# Altium PCB PWR_Supply_with_BUCK_Converter.PcbDoc
Units mm, origin at the board's own origin, x right, y up, seen from the top; angles counter-clockwise.
Board outline 84.5 x 26.75 mm, 2 copper layers (Top Layer, Bottom Layer); 14 components, 8 nets, 39 pads, 9 vias.
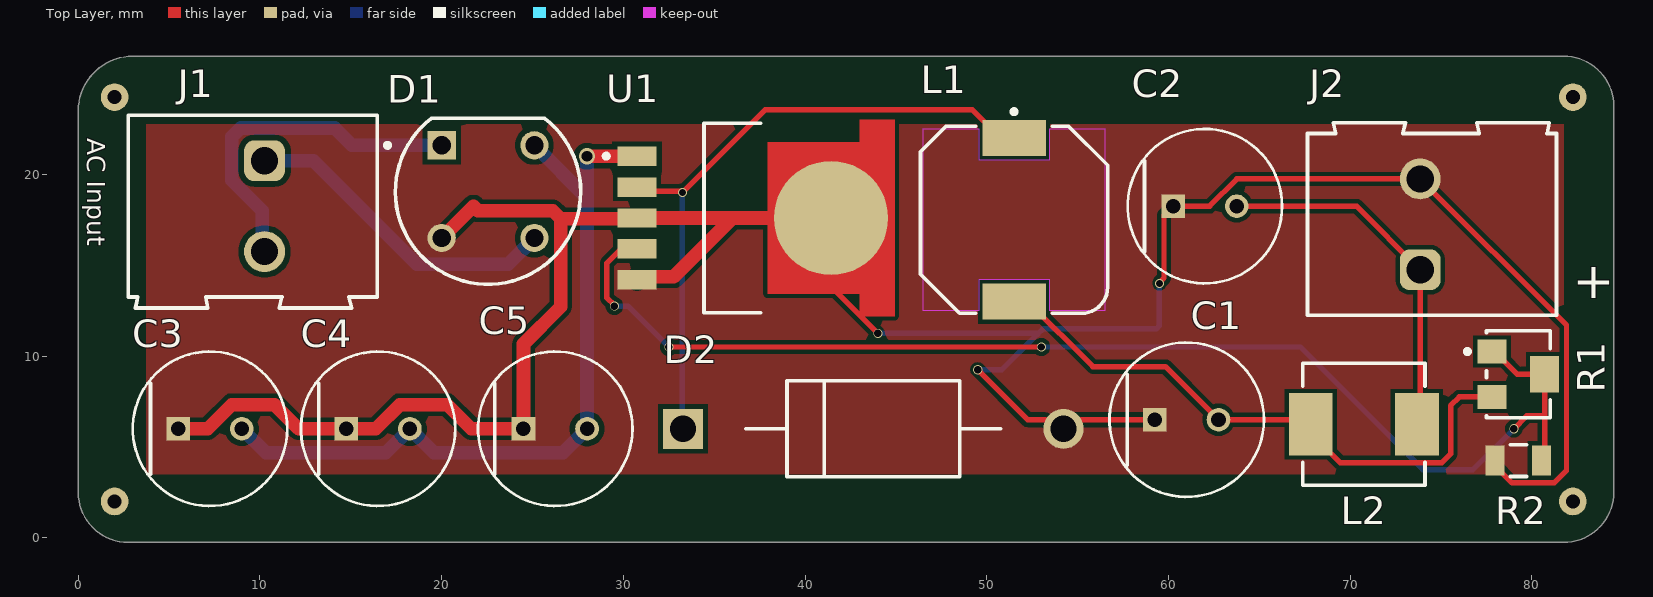
[diagram p0: Top Layer view]
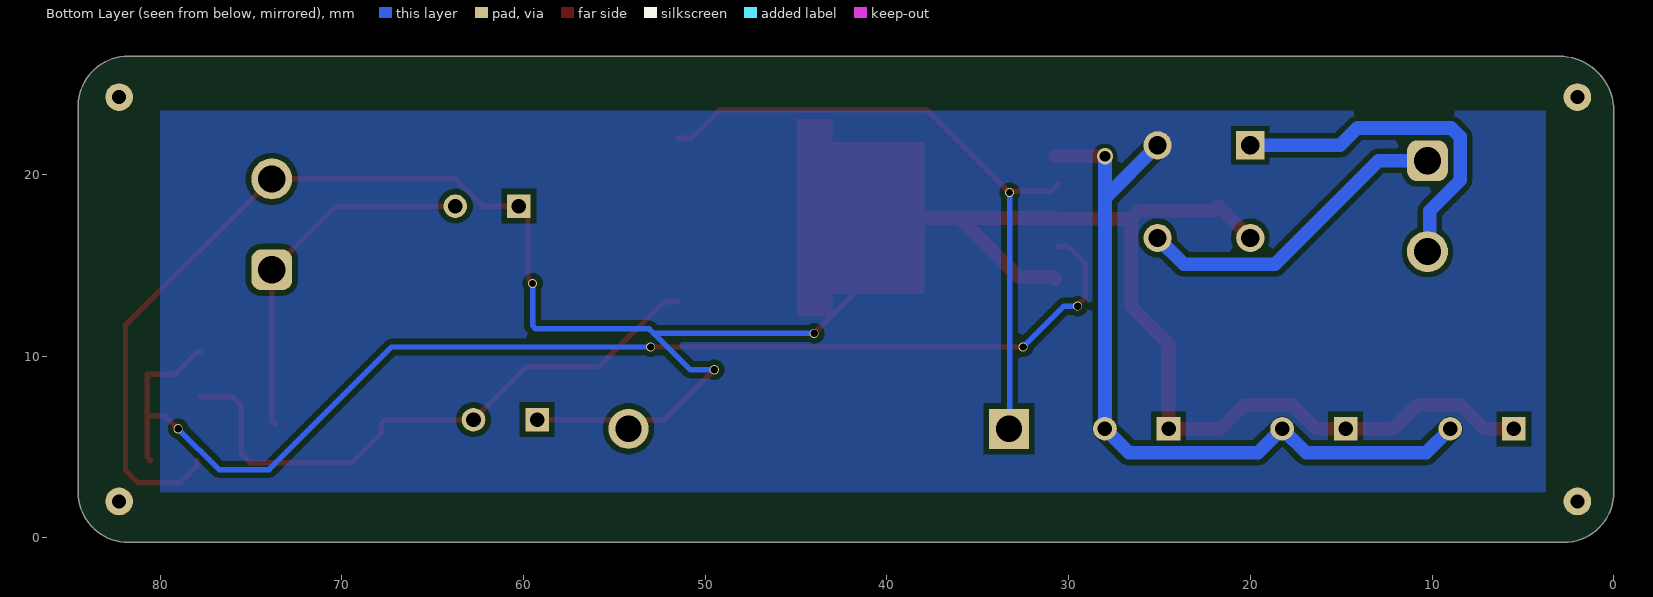
[diagram p1: Bottom Layer view, seen from below]
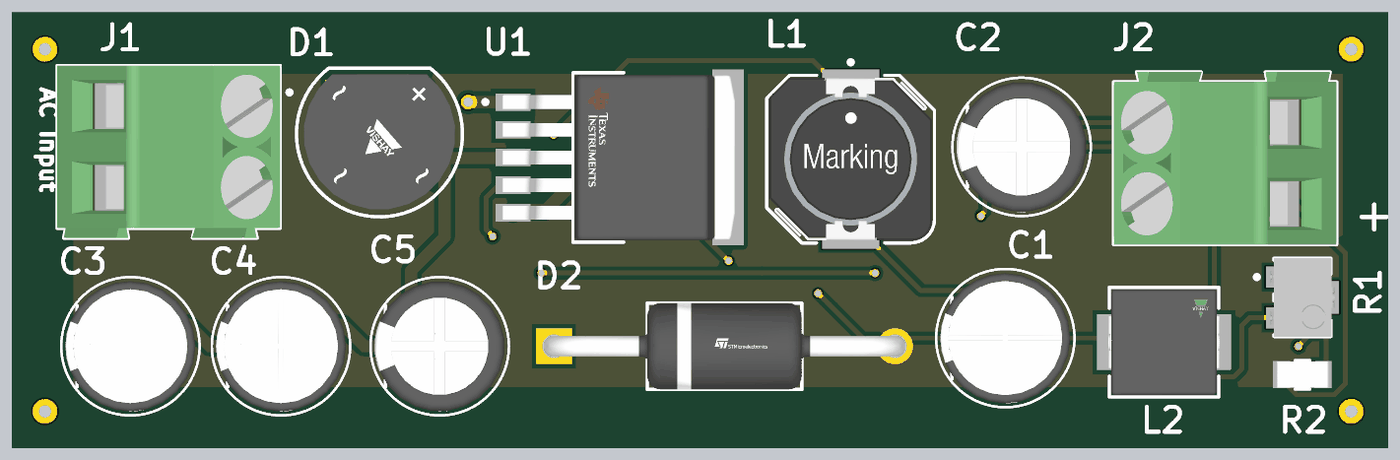
[diagram p2: 3D render of the assembled board from above, using the file's embedded part models]

## Layer stack, top to bottom
Top Solder: solder mask 0.0102, Solder Resist, Dk 3.5
Top Layer: signal copper 0.0356
Dielectric 1: core 0.32, FR-4, Dk 4.8
Bottom Layer: signal copper 0.0356
Bottom Solder: solder mask 0.0102, Solder Resist, Dk 3.5

## Board outline
2.75,-0.25 81.75,-0.25 ccw(c81.75,2.5) 84.5,2.5 84.5,23.75 ccw(c81.75,23.75) 81.75,26.5 3,26.5 ccw(c3,23.5) 0,23.5 0,2.5 ccw(c2.75,2.5)

## Design rules (kind name [scope] priority, off if disabled: settings)
Clearance PWR_Clearance [(InNet('AC50p+') OR InNet('AC50p-') OR InNet('Rectified50DC'))] p1: gap=0.3 ignorepadtopadclearanceinfootprint=FALSE
Clearance [All] p2: gap=0.25 ignorepadtopadclearanceinfootprint=FALSE
PlaneConnect [All] p1: planeconnectstyle=Direct reliefexpansion=0.508 reliefentries=4 reliefconductorwidth=0.254 reliefairgap=0.254
PolygonConnect [All] p1: connectstyle=Direct reliefconductorwidth=0.254 reliefentries=4 polygonreliefangle="90 Angle" airgapwidth=0.254
RoutingVias PWR_RoutingVias [(InNet('AC50p+') OR InNet('AC50p-') OR InNet('Rectified50DC'))] p1: holewidth=0.7 width=1 viastyle="Through Hole" minholewidth=0.5 minwidth=0.8 maxholewidth=0.6 maxwidth=0.9
RoutingVias [All] p2: holewidth=0.4 width=0.5 viastyle="Through Hole" minholewidth=0.4 minwidth=0.5 maxholewidth=0.4 maxwidth=0.5
SilkToSolderMaskClearance [IsPad] p1: minsilkscreentomaskgap=0.2 clearancetoexposedcopper=TRUE
SolderMaskExpansion [All] p1: expansion=0.102 istentingtop=FALSE
SupplyNets "Schematic Supply Nets" [InNet('GND')] p1: voltage=0.000
Width PWR_Width [(InNet('AC50p+') OR InNet('AC50p-') OR InNet('Rectified50DC') OR InNet('GND'))] p1: maxlimit=1 minlimit=0.3 preferedwidth=0.75
Width Widh [All] p2: maxlimit=0.3 minlimit=0.1 preferedwidth=0.2
28 further rules are at their usual default settings.

## Classes and differential pairs
component class PWR_Supply_With_BUCK_Converter: C1 C2 C4 C5 D2 J1 J2 L1 L2 R1 R2 U1

## Components (designator, comment, footprint, x,y, rotation, side; value= is the part's Value field where it differs from the comment)
C1 "EEUFM1V221L" FP-RAD-TH-D_8_0_5-L_15_1-MFG 61,6.5 r0 top
C2 "EEUFR1H101" FP-RAD-TH-D_8_0_5-L_11_5-MFG 62,18.25 r0 top
C3 "EEUFK0J102L" FP-RAD-TH-D_8_0_5-L_15_1-MFG 7.25,6 r0 top
C4 "EEUFK0J102L" FP-RAD-TH-D_8_0_5-L_15_1-MFG 16.5,6 r0 top
C5 "EEUFR1H101" FP-RAD-TH-D_8_0_5-L_11_5-MFG 26.25,6 r0 top
D1 "W02G-E4/51" FP-WOG-MFG 22.55,18.54 r0 top
D2 "1N5822" FP-DO-201AD-MFG 43.75,6 r0 top
J1 "691211720002" 691211720002 9.6,18.25 r270 top
J2 "691211720002" 691211720002 74.5,17.25 r90 top
L1 "7447714330" WE-PD_1050P 51.5,17.5 r0 top
L2 "IHLP2525CZER220M11" FP-IHLP-2525CZ-FP_2_413x3-MFG 70.75,6.25 r0 top
R1 "3214W-1-502E" BOUR-3214W_V 79.25,9 r0 top
R2 "MCA12060D5000BP500" FP-MCA1206-IPC_C 79.25,4.25 r0 top
U1 "LM2596SX-3.3/NOPB" FP-KTT0005B-MFG 38.88,17.6 r270 top

## Footprints (in the part's own frame and the unit in brackets; to place one, negate y for a bottom-side part, rotate by r counter-clockwise, add the part's x,y. Pads: shape width x height; smd on the part's side, far side on the other; paste and mask are expansions set on the pad)
691211720002 [mm] "5,00mm - modular - green -45¡ã entry with rising cage clamp - 02p"
  rrect50% 2.25x2.25 hole 1.5: 1(-2.5,0.65)
  round 2.25 hole 1.5: 2(2.5,0.65)
  silkscreen extent -5,-6.85 5.6,6.85, body extent -5,-6.85 5.6,6.85, height 15.72
BOUR-3214W_V [mm] "SMD, 3-Leads, Body 3.5x4.8mm, Pitch 1.25mm"
  rect 1.6x1.3 smd paste+0: 1(-1.45,1.25) 3(-1.45,-1.25)
  rect 1.6x2 smd paste+0: 2(1.45,0)
  silkscreen extent -2.92,-2.4 1.75,2.4, body extent -1.98,-2.41 1.98,2.41, height 5.28
FP-DO-201AD-MFG [mm]
  rect 2.2x2.2 hole 1.45 paste-2539.97 mask+0: 1(-10.47,0)
  round 2.2 hole 1.45 paste-2539.97 mask+0: 2(10.47,0)
  silkscreen extent -7,-2.65 7,2.65, body extent -11.67,-2.75 11.67,2.75, height 0.25
FP-IHLP-2525CZ-FP_2_413x3-MFG [mil]
  rect 95x135 smd paste+0 mask+0: 1(-115,0) 2(115,0)
  silkscreen extent -132,-132 132,132, body extent -166,-136 166,136, height 10
FP-KTT0005B-MFG [mm]
  rect 1.07x2.16 smd paste+0 mask+0: 1(-3.4,-8.13) 2(-1.7,-8.13) 3(0,-8.13) 4(1.7,-8.13) 5(3.4,-8.13)
  round 6.291 smd paste+0 mask+0: 6(0,2.545)
  Top Layer region: -5.4,6.04 5.4,6.04 5.4,4.13 4.165,4.13 4.165,-0.95 -4.165,-0.95 -4.165,4.13 -5.4,4.13 -5.4,6.04
  silkscreen extent -5.21,-9.95 5.21,-1.33, body extent -5.5,-9.31 5.5,6.14, height 0.25
FP-MCA1206-IPC_C [mm]
  rect 1.056x1.658 smd paste+0 mask+0: 1(-1.276,0) 2(1.276,0)
  silkscreen extent -0.45,-0.87 0.45,0.87, body extent -1.9,-0.97 1.9,0.97, height 0.25
FP-RAD-TH-D_8_0_5-L_11_5-MFG [mm]
  rect 1.3x1.3 hole 0.8 paste-2539.97 mask+0: 1(-1.75,0)
  round 1.3 hole 0.8 paste-2539.97 mask+0: 2(1.75,0)
  silkscreen extent -4.25,-4.25 4.25,4.25, body extent -4.35,-4.35 4.35,4.35, height 0.25
FP-RAD-TH-D_8_0_5-L_15_1-MFG [mm]
  rect 1.3x1.3 hole 0.8 paste-2539.97 mask+0: 1(-1.75,0)
  round 1.3 hole 0.8 paste-2539.97 mask+0: 2(1.75,0)
  silkscreen extent -4.25,-4.25 4.25,4.25, body extent -4.35,-4.35 4.35,4.35, height 0.25
FP-WOG-MFG [mm]
  rect 1.55x1.55 hole 1 paste-2539.97 mask+0: 1(-2.55,3.06)
  round 1.55 hole 1 paste-2539.97 mask+0: 2(2.55,3.06) 3(-2.55,-2.04) 4(2.55,-2.04)
  silkscreen extent -5.65,-4.59 5.1,4.54, body extent -5.03,-4.52 5.03,4.52, height 0.25
WE-PD_1050P [mm] "SMD Shielded Power Inductor, 2-leads, body 10x10mm"
  rect 3.5x2 smd: 1(0,4.5) 2(0,-4.5)
  Top Layer keep-out region: 5,-5 1.95,-5 1.95,-3.3 -1.95,-3.3 -1.95,-5 -5,-5 -5,5 -1.95,5 -1.95,3.3 1.95,3.3 1.95,5 5,5
  silkscreen extent -5.15,-5.15 5.15,6.07, body extent -5,-5 5,5, height 4.79

## Part data
C1: library part CMP-05427-000678-1, "Aluminum Electrolytic Capacitors (Radial Lead Type) 220uF ±20% 35V", Capacitance=220uF, Case/Package=Radial, Dielectric Material=Aluminium, ESR (Equivalent Series Resistance)=41mR, Max Operating Temperature=105°C, Min Operating Temperature=-40°C, Package Quantity=200, Ripple Current=1.24A, Tolerance=20%, Voltage=35V, Construction=RADIAL, Diameter=8mm, Dissipation Factor=0.12%, Height=15mm, Height - Seated (Max)=0.65inch, Impedance=41mR, Lead Diameter=0.6mm, Lead Free="Lead Free", Lead Length=17mm, Lead Pitch=3.5mm, Length=15mm, Life (Hours)=3000Hour, Mount="Through Hole", Number of Pins=2, Packaging=Bulk, Radiation Hardening=No, REACH SVHC=Yes, RoHS Compliant=Yes, Series=FM, Termination=Radial, Voltage Rating=35V, Voltage Rating (DC)=35V
C2 C5: library part CMP-05427-002079-1, "Aluminum Electrolytic Capacitors (Radial Lead Type) 100uF ±20% 50V", Capacitance=100uF, Case/Package=Radial, ESR (Equivalent Series Resistance)=61mR, Max Operating Temperature=105°C, Min Operating Temperature=-40°C, Package Quantity=200, Ripple Current=870mA, Tolerance=20%, Voltage=50V, Construction=RADIAL, Contact Plating=Tin, Diameter=8mm, Height=11.5mm, Height - Seated (Max)=0.512inch, Impedance=61mR, Lead Diameter=0.6mm, Lead Pitch=3.5mm, Lead/Base Style=Straight, Length=11.5mm, Life (Hours)=6000Hour, Mount="Through Hole", Number of Pins=2, Packaging=Bulk, Radiation Hardening=No, REACH SVHC="No SVHC", Ripple Current (AC)=870mA, RoHS Compliant=Yes, Series=FR, Termination=Radial, Voltage Rating=50V, Voltage Rating (DC)=50V
C3 C4: library part CMP-05427-000688-1, "Aluminum Electrolytic Capacitors (Radial Lead Type) AEC-Q200 Qualified 1000uF ±20% 6.3V", Capacitance=1mF, Case/Package=Radial, Dielectric Material=Aluminium, Max Operating Temperature=105°C, Min Operating Temperature=-55°C, Ripple Current=860mA, Tolerance=20%, Voltage=6.3V, Construction=RADIAL, Contact Plating=Tin, Diameter=8mm, Height=15mm, Impedance=62mR, Lead Diameter=0.6mm, Lead Pitch=3.5mm, Length=0inch, Life (Hours)=3000Hour, Mount="Through Hole", Number of Pins=2, Packaging=Bulk, Radiation Hardening=No, REACH SVHC="No SVHC", RoHS Compliant=Yes, Series="FK Radial", Termination=Radial, Voltage Rating=6.3V, Voltage Rating (DC)=6.3V, Width=0inch
D1: library part CMP-02540-000101-1, "BRIDGE RECT 1PHASE 200V 1.5A WOG", Average Rectified Current=1.5A, Capacitance=14pF, Forward Voltage=1V, Max Forward Surge Current (Ifsm)=50A, Max Operating Temperature=150°C, Max Repetitive Reverse Voltage (Vrrm)=200V, Max Reverse Current=5uA, Min Operating Temperature=-55°C, Package Quantity=3000, Diameter=9mm, Element Configuration=Single, Forward Current=1.5A, Height=5.6mm, Lead Free="Lead Free", Length=9.86mm, Max Reverse Leakage Current=5uA, Max Surge Current=50A, Mount="Through Hole", Number of Elements=1, Number of Pins=4, Output Current=1.5A, Packaging=Bulk, Peak Non-Repetitive Surge Current=50A, Radiation Hardening=No, RoHS Compliant=Yes, Series=-, Width=8.84mm
D2: library part CMP-12187-000025-1, "DIODE SCHOTTKY 40V 3A DO201AD", Forward Current=3A, Manufacturer=STMicroelectronics, Max Junction Temp=+150°C, Max Repetitive Reverse Voltage=40V, Max Surge Forward Current=80A, Package=DO-201AD, Peak Reverse Current=2mA, Temperature="to +150°C", Automotive=No, Category=Diode, ComponentLink2Description=Datasheet, ComponentLink2URL=https://www.st.com/resource/en/datasheet/1n5822.pdf, Device Class L1="Discrete Semiconductors", Device Class L2=Diodes, Device Class L3="Schottky Diodes", Digikey Description="DIODE SCHOTTKY 40V 3A DO201AD", Height=5.3mm, Lead Free=Yes, Manufacturer Part Number=1N5822, Mouser Description="Schottky Diodes & Rectifiers Vr/40V Io/3A BULK", Octopart=https://octopart.com/1n5822-stmicroelectronics-323225, RoHS=TRUE, Temperature Range High=+150°C
J1 J2: library part CMP-1502-02524-2, Color=Green, Current=10A, Max Operating Temperature=105°C, Min Operating Temperature=-40°C, Voltage=300V, Connector Type="PCB, Terminal Block", Contact Material=Brass, Contact Plating=Tin, Height=15.5mm, Housing Material=Nylon, Lead Pitch=5mm, Length=13.7mm, Mount="Through Hole", NexarPartId=8917714, Number of Contacts=2, Number of Levels=1, Number of Pins=2, Number of Positions Per Level=2, Packaging=Box, Pitch=5.0038mm, Plating="Brass, Steel", REACH SVHC=Unknown, RoHS=Compliant, Stripping Length=-7mm, Termination=Screw, Width=10mm, Wire Gauge (Max)=24AWG, Wire Gauge (Min)=12AWG, Wire/Cable Gauge=12AWG
L1: library part CMP-1396-00022-2, Ambient Temperature Range High=110°C, Ambient Temperature Range Low=-40°C, Case/Package=Nonstandard, Current Rating=2.5A, DC Resistance (DCR)=66mΩ, Inductance=33µH, Inductance Tolerance=20%, Max Operating Temperature=150°C, Resistance=79mΩ, Saturation Current=2.9A, Self Resonant Frequency=11.1MHz, Test Frequency=100kHz, Composition=Wirewound, Core Material=Ferrite, Depth=10mm, Height=5mm, Height - Seated (Max)=5.0038mm, Length=10mm, Max DC Current=2.5A, Min Operating Temperature=-40°C, Mount="Surface Mount", NexarPartId=22866944, Number of Pins=2, Packaging="Cut Tape (CT)", REACH SVHC=Unknown, RMS Current (Irms)=2.5A, RoHS=Compliant, Series Resistance=79mΩ, Shielding=Shielded, Termination=SMD/SMT, Tolerance=20%, Width=10mm
L2: library part CMP-2000-06442-2, "Commercial Inductors, Low DCR Series 22uH 2.9A 135mΩ 20%", Case Code (Imperial)=2525, Case Code (Metric)=6363, Current Rating=2.9A, DC Resistance (DCR)=135mR, Inductance=22uH, Inductance Tolerance=20%, Max Operating Temperature=125°C, Min Operating Temperature=-55°C, Package Quantity=2000, Saturation Current=2.5A, Self Resonant Frequency=1MHz, Test Frequency=100kHz, Case/Package=2525, Contact Plating=Tin, Core Material=Ferrite, Depth=6.72mm, Height=3mm, Height - Seated (Max)=0.118inch, Lead Free="Lead Free", Length=7.24mm, Max DC Current=2.9A, Military Standard=Not, Mount="Surface Mount", Number of Pins=2, Packaging="Tape and Reel", Radiation Hardening=No, RMS Current (Irms)=2.9A, Shielding=Shielded, Termination=SMD/SMT, Tolerance=20%, Width=0.255inch
R1: library part CMP-2000-05579-1, "3214 - 5-Turn Trimpot(R) Trimming Potentiometer, 5 KOhm, +/- 10%, 0.25 W, -65 to 150 degC, RoHS, Tape and Reel", Manufacturer=Bourns, Package Description="3-Pin Surface Mount Device, Body 3.5 x 4.8 mm, Pitch 1.25 mm", Package Reference=3214W, Power Rating=250mW, Resistance Tolerance=±10%, Temperature Coefficient=±100ppm/°C, Track Resistance=5kohm, Datasheet URL=http://www.bourns.com/docs/Product-Datasheets/3214.pdf, Datasheet Version=05/2016, Manufacturer URL=http://www.bourns.com/, Mounting Technology=SurfaceMount, No. of Turns=5, Potentiometer Mounting=SMD, RoHS Compliant=Yes, SVHC=NoSVHC(16-Jun-2014)
R2: library part CMP-02407-005036-1, "Res MC Precision Thin Film 1206 500Ω 0.1% 0.25W ±25ppm/°C Molded Paper T/R", Case/Package=1206, Max Operating Temperature=125°C, Max Power Dissipation=250mW, Min Operating Temperature=-55°C, Package Quantity=5000, Resistance=500R, Temperature Coefficient=25ppm/°C, Tolerance=0.1%, Composition="Thin Film", Depth=1.6mm, Height=0.026inch, Lead Free="Lead Free", Length=0.126inch, Military Standard=Not, Number of Terminations=2, Packaging="Tape and Reel", Width=0.063inch
U1: library part CMP-04918-000394-1, "IC REG BUCK 3.3V 3A TO263-5", Case/Package=TO-263-5, Max Input Voltage=40V, Max Operating Temperature=125°C, Max Output Current=3A, Min Input Voltage=4.5V, Min Operating Temperature=-40°C, Min Output Voltage=3.3V, Operating Supply Current=5mA, Package Quantity=500, Switching Frequency=173kHz, Efficiency=73%, Lead Free="Contains Lead", Min Supply Voltage=4.5V, Mount="Surface Mount", Nominal Output Voltage=3.3V, Number of Outputs=1, Number of Pins=5, Operating Supply Voltage=40V, Output Configuration=Positive, Output Current=3A, Output Type=Fixed, Output Voltage=3.3V, Packaging="Cut Tape", Quiescent Current=5mA, Radiation Hardening=No, REACH SVHC="No SVHC", RoHS Compliant=Yes, Series=LM2596, Synchronous Rectifier=No, Weight=0.056128oz

## Free pads (board coordinates)
  round 1.524 hole 0.762: 2(2,24.25) 3(2,2) 4(82.25,2) 5(82.25,24.25)

## Via types
v1: diameter 0.5, hole 0.4, Top Layer to Bottom Layer, 8 vias
v2: diameter 0.9, hole 0.6, Top Layer to Bottom Layer, 1 vias

## Nets (pads, with @x,y where several pads share a name; then routed paths per layer and width w, separated by ;. In a path a pad name is that pad's centre, name@x,y a point inside that pad or via, vN(x,y) a via of type N, cw(c..) or ccw(c..) an arc to the next point about the centre after c; other vN are vias at no path point)
AC50p+: D1.1 J1.2 | length 19.2
  Bottom Layer w0.75: J1.2 10.125,15.875 10.125,18 8.45,19.675 8.45,22.061 8.939,22.55 14.112,22.55 15.062,21.6 D1.1
AC50p-: D1.4 J1.1 | length 17.8
  Bottom Layer w0.75: J1.1 12.943,20.75 18.643,15.05 23.65,15.05 D1.4
Feedback_path: R1.1 R1.2 R2.2 U1.4 | length 68.8
  Top Layer w0.3: v1(29.5,12.75) 29.5,12.804 29.095,13.209 29.095,15.115 30.03,16.05 U1.4@30.575,16.05 ; v1(32.5,10.5) v1(53,10.5) ; R1.1 77.95,10.25 79.2,9 R1.2 80.7,6.712 ; v1(79,6) 79.712,6.712 80.7,6.712 ; R2.2 80.7,4.424 80.7,6.712
  Bottom Layer w0.3: v1(29.5,12.75) 29.504,12.746 30.254,12.746 v1(32.5,10.5) ; v1(53,10.5) 67.25,10.5 74,3.75 76.75,3.75 v1(79,6)
Filtered_Output: C2.2 J2.1 L2.2 | length 20.1
  Top Layer w0.3: C2.2 70.35,18.25 J2.1 73.85,6.429 L2.2
GND: C1.1 C2.1 C3.1 C4.1 C5.1 D1.3 D2.2 J2.2 R2.1 U1.3 U1.5 U1.6 | length 146.8
  Top Layer w0.3: U1.5@30.575,14.35 U1.5@30.75,14.35 ; U1.6@41.25,17.75 41.25,17.6 41.25,14 v1(44,11.25) ; v1(49.5,9.25) 52.25,6.5 53.206,6.5 53.342,6.364 54.614,6.364 54.75,6.5 C1.1 ; v1(59.5,14) 59.5,14.054 59.75,14.304 59.75,17.75 C2.1 62.265,18.25 63.765,19.75 J2.2 81.9,11.7 81.9,3.701 81.22,3.021 78.902,3.021 77.974,3.949 R2.1
  Top Layer w0.75: C3.1 7.126,6 8.451,7.325 10.801,7.325 12.126,6 C4.1 16.376,6 17.701,7.325 20.301,7.325 21.626,6 C5.1 24.5,10.663 26.55,12.713 26.55,17.561 ; D1.3 21.75,18.25 22,18 26.111,18 26.55,17.561 ; U1.5 30.75,14.253 30.857,14.36 32.76,14.36 36,17.6 ; U1.6 41.25,17.6 36,17.6 ; 26.55,17.561 30.711,17.561 U1.3 36,17.6
  Bottom Layer w0.3: v1(44,11.25) 52.75,11.25 52.79,11.21 ; v1(49.5,9.25) 50.831,9.25 52.79,11.21 ; v1(59.5,14) 59.5,11.676 59.324,11.5 53.081,11.5 52.79,11.21
NetC1_2: C1.2 L1.2 L2.1 R1.3 | length 33.3
  Top Layer w0.3: L1.2 52.25,13 55.829,9.421 59.829,9.421 C1.2 67.579,6.5 L2.1 67.829,5.742 69.436,4.135 75.043,4.135 75.522,4.614 75.522,7.272 76,7.75 R1.3
NetD2_1: D2.1 L1.1 U1.2 | length 36.7
  Top Layer w0.3: U1.2@30.575,19.45 30.96,19.065 33.131,19.065 33.196,19 v1(33.25,19) 37.8,23.55 49.2,23.55 50.75,22 L1.1
  Bottom Layer w0.3: v1(33.25,19) 33.25,6.03 D2.1
Rectified50DC: C3.2 C4.2 C5.2 D1.2 U1.1 | length 43
  Top Layer w0.75: v2(28,21) U1.1
  Bottom Layer w0.75: C3.2 10.325,4.675 16.925,4.675 C4.2 19.575,4.675 26.675,4.675 C5.2 28,18.7 ; D1.2 28,18.7 ; v2(28,21) 28,18.7

## Polygon pours and split planes (outlines as drawn)
GND on Top Layer "GND_L01_P000" (solid, remove dead copper, pour order 0): 3.75,22.75 3.75,3.5 81.75,3.5 81.75,22.75
Rectified50DC on Bottom Layer "RECTIFIED50DC_L02_P001" (solid, remove dead copper, pour order 1): 3.75,23.5 3.75,2.5 80,2.5 80,23.5

## Silkscreen, mask and mechanical layers (free items; w line width, h text height)
Top Overlay:
  text "AC Input" at 0.5,22 h1 r270
  text "+" at 82.254,13.171 h2